# Altium PCB helix_4_multi_shield_host.PcbDoc (part 3 of 3)
Units mm, origin at the board's own origin, x right, y up, seen from the top; angles counter-clockwise.
Board outline 150 x 170 mm, 2 copper layers (Top Layer, Bottom Layer); 120 components, 166 nets, 674 pads, 2020 vias.
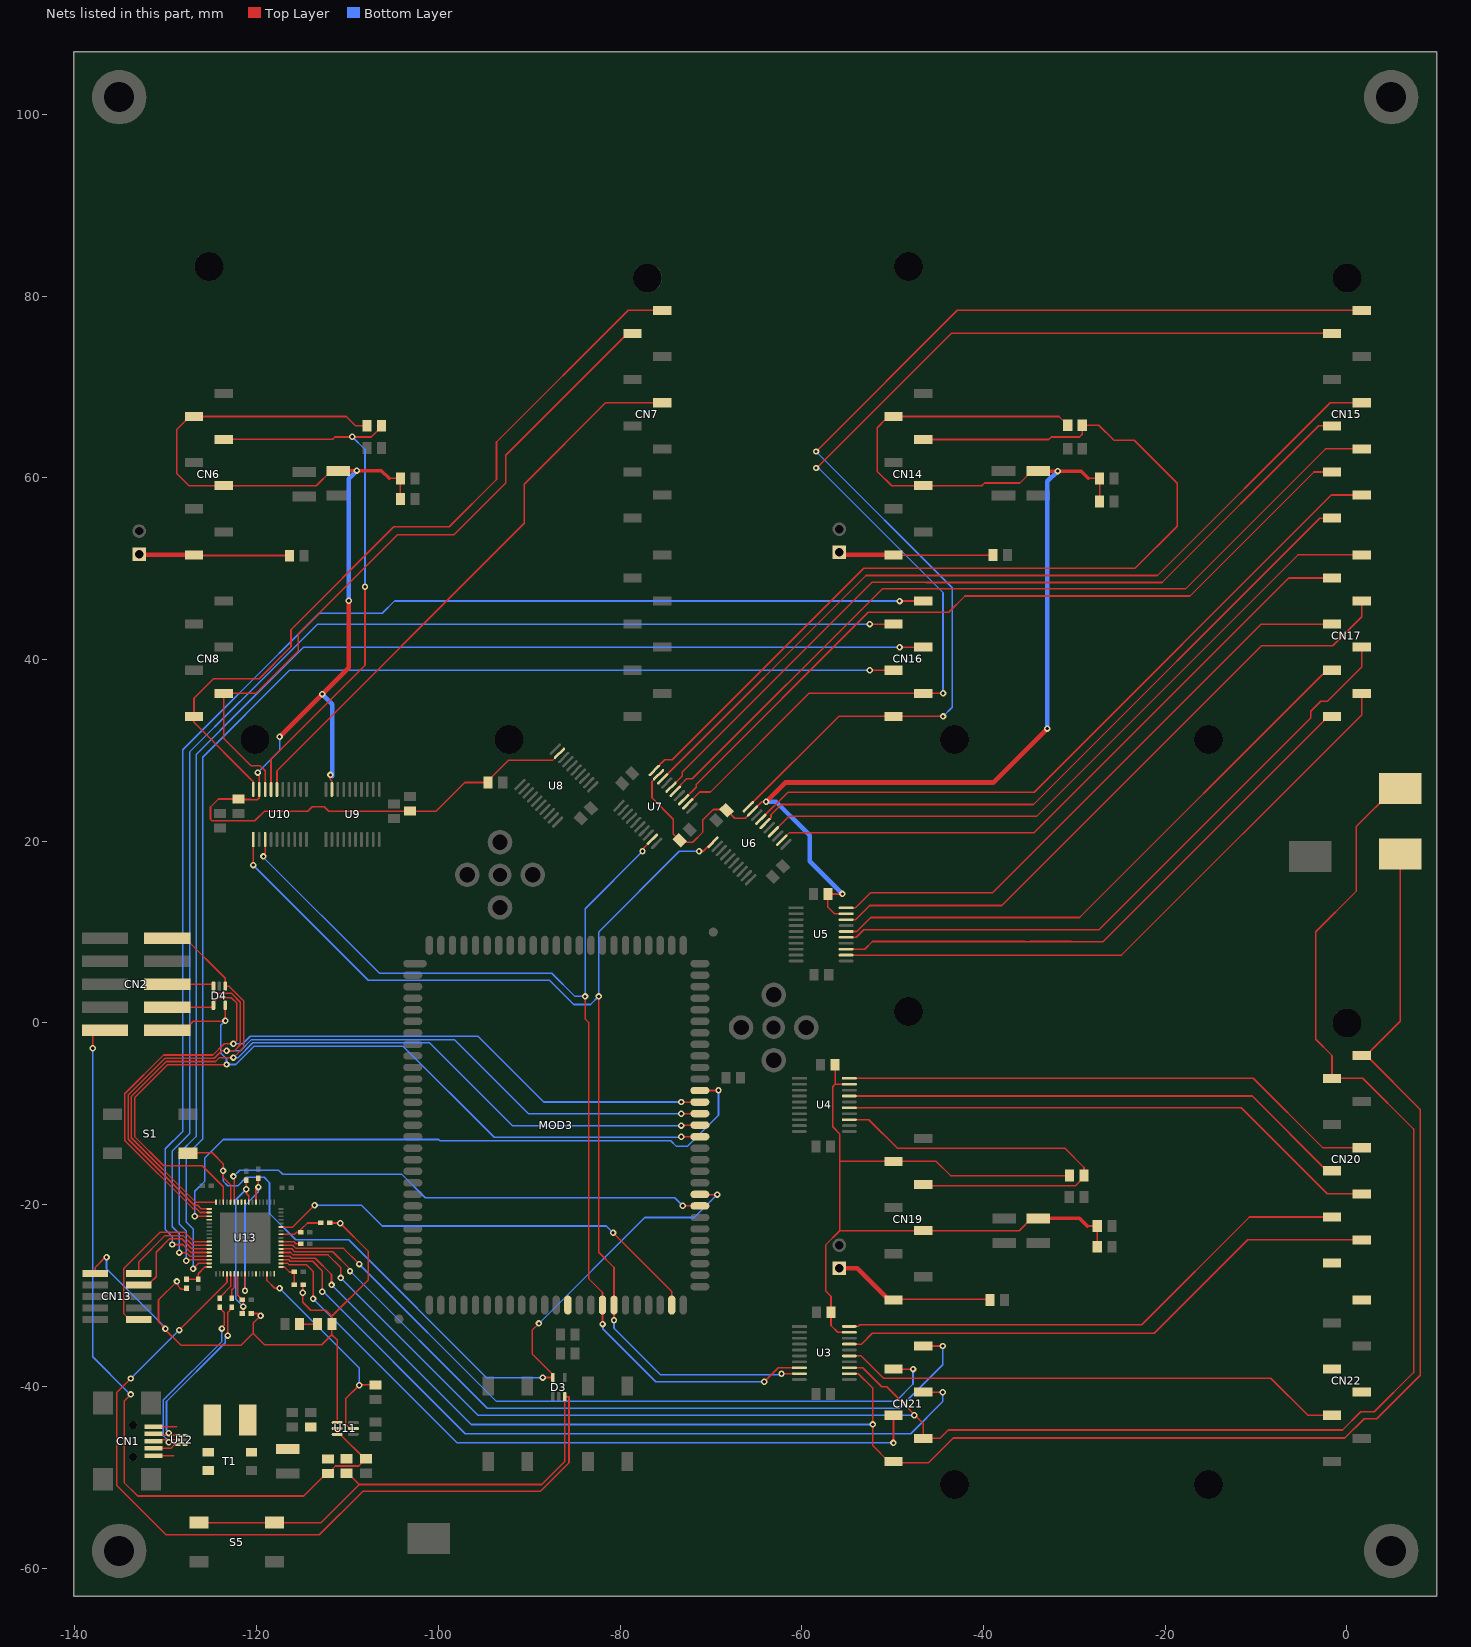
[diagram p3: the nets of this part, all layers, seen from the top]

## Via types
v1: diameter 0.711, hole 0.356, Top Layer to Bottom Layer, tented both sides, 2016 vias
v2: diameter 0.711, hole 0.356, Top Layer to Bottom Layer, tented top, 4 vias

## Nets (pads, with @x,y where several pads share a name; then routed paths per layer and width w, separated by ;. In a path a pad name is that pad's centre, name@x,y a point inside that pad or via, vN(x,y) a via of type N, cw(c..) or ccw(c..) an arc to the next point about the centre after c; other vN are vias at no path point) (continued)
MOD0_D13: CN7.34 U10.16 | length 63.8
  Top Layer w0.178: U10.16@-117.766,25.7 -117.766,27.776 -90.551,54.991 -90.551,59.309 -81.592,68.268 CN7.34@-75.36,68.268
MOD1_A0: CN16.9 U13.13 | length 148.3
  Top Layer w0.178: v1(-129.286,-24.384) -128.128,-24.384 -127.245,-25.267 U13.13@-125.219,-25.267 ; v1(-49.234,46.44) CN16.9@-46.62,46.44
  Bottom Layer w0.178: v1(-129.286,-24.384) -129.286,-23.495 -130.048,-22.733 -130.048,-13.843 -128.143,-11.938 -128.143,30.068 -122.413,35.799 -122.204,36.007 -121.996,36.215 -113.126,45.085 -106.172,45.085 -104.817,46.44 v1(-49.234,46.44)
MOD1_A1: CN16.10 U13.14 | length 143
  Top Layer w0.178: v1(-128.524,-25.273) -127.742,-25.273 -127.348,-25.667 U13.14@-125.219,-25.667 ; v1(-52.514,43.9) CN16.10@-49.9,43.9
  Bottom Layer w0.178: v1(-128.524,-25.273) -128.524,-23.197 -129.286,-22.435 -129.286,-14.097 -127.381,-12.192 -127.381,29.825 -121.91,35.296 -121.701,35.504 -113.306,43.9 v1(-52.514,43.9)
MOD1_A2: CN16.11 U13.15 | length 144.3
  Top Layer w0.178: v1@-127.762,-26.067 U13.15@-125.219,-26.067 ; v1(-49.234,41.36) CN16.11@-46.62,41.36
  Bottom Layer w0.178: v1(-127.762,-26.162) -127.762,-22.9 -128.524,-22.138 -128.524,-14.351 -126.67,-12.497 -126.67,29.53 -121.407,34.793 -114.84,41.36 v1(-49.234,41.36)
MOD1_A3: CN16.12 U13.16 | length 139.4
  Top Layer w0.178: v1(-127,-27.051) -126.416,-26.467 U13.16@-125.219,-26.467 ; v1(-52.514,38.82) CN16.12@-49.9,38.82
  Bottom Layer w0.178: v1(-127,-27.051) -127,-22.656 -127.75,-21.906 -127.75,-14.593 -125.933,-12.776 -125.933,29.261 -116.374,38.82 v1(-52.514,38.82)
MOD1_D0: CN17.21 U5.13 | length 64.2
  Top Layer w0.178: U5.13@-55.116,8.12 -53.062,8.12 -52.216,8.966 -35.449,8.966 -35.411,8.928 -34.896,8.928 -34.858,8.966 -30.369,8.966 -30.331,8.928 -26.852,8.928 -2.04,33.74 CN17.21@-1.64,33.74
MOD1_D1: CN17.22 U5.12 | length 70.1
  Top Layer w0.178: U5.12@-55.116,7.47 -24.799,7.47 1.64,33.909 CN17.22@1.64,36.28
MOD1_D2: CN17.23 U5.16 | length 65.4
  Top Layer w0.178: U5.16@-55.116,10.07 -53.938,10.07 -52.4,11.608 -29.422,11.608 -2.21,38.82 CN17.23@-1.64,38.82
MOD1_D3: CN17.24 U5.15 | length 71.7
  Top Layer w0.178: U5.15@-55.116,9.42 -54.004,9.42 -53.162,10.262 -27.279,10.262 -3.975,33.566 -3.975,34.303 -2.871,35.407 -2.133,35.407 1.634,39.174 1.634,41.354 CN17.24@1.64,41.36
MOD1_D4: CN17.25 U5.20 | length 66.4
  Top Layer w0.178: U5.20@-55.116,12.67 -54.08,12.67 -52.399,14.351 -38.989,14.351 -9.44,43.9 CN17.25@-1.64,43.9
MOD1_D5: CN17.26 U5.18 | length 72.3
  Top Layer w0.178: U5.18@-55.116,11.37 -54.08,11.37 -52.521,12.929 -37.998,12.929 -9.398,41.529 -1.551,41.529 1.64,44.72 CN17.26@1.64,46.44
MOD1_D6: CN17.27 U6.12 | length 72.5
  Top Layer w0.178: U6.12@-62.2,20.112 -61.357,20.955 -34.417,20.955 -6.392,48.98 CN17.27@-1.64,48.98
MOD1_D7: CN17.28 U6.14 | length 77.4
  Top Layer w0.178: U6.14@-63.119,21.031 -61.417,22.733 -34.163,22.733 -5.376,51.52 CN17.28@1.64,51.52
MOD1_D8: CN15.29 U6.16 | length 76.5
  Top Layer w0.178: U6.16@-64.038,21.95 -63.382,22.606 -63.382,22.929 -62.263,24.049 -34.498,24.049 -2.979,55.568 CN15.29@-1.64,55.568
MOD1_D9: CN15.30 U6.17 | length 80.9
  Top Layer w0.178: U6.17@-64.498,22.41 -61.508,25.4 -34.417,25.4 -1.709,58.108 CN15.30@1.64,58.108
MOD1_D10: CN15.31 U7.13 | length 86.5
  Top Layer w0.178: U7.13@-73.01,24.572 -71.628,25.953 -71.628,26.255 -52.671,45.212 -43.815,45.212 -42.037,46.99 -17.272,46.99 -3.614,60.648 CN15.31@-1.64,60.648
MOD1_D11: CN15.32 U7.15 | length 90.8
  Top Layer w0.178: U7.15@-73.617,25.835 -73.585,25.835 -73.3,26.12 -73.3,26.255 -72.681,26.873 -72.06,26.873 -51.156,47.777 -17.755,47.777 -2.344,63.188 CN15.32@1.64,63.188
MOD1_D12: CN15.33 U7.16 | length 89.5
  Top Layer w0.178: U7.16@-74.388,25.95 -73.152,27.187 -73.152,27.626 -52.264,48.514 -46.309,48.514 -46.284,48.489 -20.345,48.489 -3.106,65.728 CN15.33@-1.64,65.728
MOD1_D13: CN15.34 U7.18 | length 94.1
  Top Layer w0.178: U7.18@-75.308,26.87 -52.927,49.251 -20.853,49.251 -1.836,68.268 CN15.34@1.64,68.268
MOD2_A0: CN21.9 U13.40 | length 86.5
  Top Layer w0.178: U13.40@-117.319,-24.867 -116.139,-24.867 -115.831,-25.174 -111.628,-25.174 -109.728,-27.075 v1(-109.728,-27.305) ; CN21.9@-46.62,-35.56 v1(-44.472,-35.56)
  Bottom Layer w0.178: v1@-109.664,-27.241 -109.664,-27.368 -94.615,-42.418 -49.276,-42.418 -44.472,-37.614 v1(-44.472,-35.56)
MOD2_A1: CN21.10 U13.41 | length 81.3
  Top Layer w0.178: U13.41@-117.319,-24.467 -116.031,-24.467 -115.679,-24.819 -110.436,-24.819 v1(-108.712,-26.543) ; CN21.10@-49.9,-38.1 v1(-47.752,-38.1)
  Bottom Layer w0.178: v1@-108.775,-26.607 -108.648,-26.607 -93.599,-41.656 -49.657,-41.656 -47.752,-39.751 v1(-47.752,-38.1)
MOD2_A2: CN21.11 U13.37 | length 87
  Top Layer w0.178: U13.37@-117.319,-26.067 -116.473,-26.067 -116.299,-26.241 -113.84,-26.241 -112.776,-27.305 v1(-112.776,-29.591) ; CN21.11@-46.62,-40.64 v1(-44.472,-40.64)
  Bottom Layer w0.178: v1@-112.903,-29.337 -97.028,-45.212 -48.006,-45.212 -44.472,-41.678 v1(-44.472,-40.64)
MOD2_A3: CN21.12 U13.36 | length 80.5
  Top Layer w0.178: U13.36@-117.319,-26.467 -116.576,-26.467 -116.446,-26.597 -114.537,-26.597 -113.792,-27.342 v1(-113.792,-30.353) ; v1@-49.9,-46.355 CN21.12@-49.9,-43.18
  Bottom Layer w0.178: v1(-113.792,-30.353) -97.917,-46.228 v1(-49.911,-46.228)
MOD2_D2: CN22.23 U3.15 | length 55.8
  Top Layer w0.178: U3.15@-54.766,-36.65 -53.455,-36.65 -51.005,-39.1 -8.366,-39.1 -4.286,-43.18 CN22.23@-1.64,-43.18
MOD2_D3: CN22.24
MOD2_D4: CN22.25
MOD2_D7: CN22.28
MOD2_D8: CN20.29
MOD2_D9: CN20.30 U3.17 | length 61.2
  Top Layer w0.178: U3.17@-54.766,-35.35 -53.435,-35.35 -52.248,-34.163 -21.209,-34.163 -10.922,-23.876 CN20.30@1.64,-23.876
MOD2_D10: CN20.31 U3.20 | length 58.6
  Top Layer w0.178: U3.20@-54.766,-33.4 -53.776,-33.4 -53.601,-33.225 -22.583,-33.225 -10.719,-21.361 CN20.31@-1.626,-21.361 ; CN20.31@-2.13,-21.336 CN20.31@-1.64,-21.336
MOD2_D11: CN20.32 U4.15 | length 60.9
  Top Layer w0.178: U4.15@-54.766,-9.346 -11.62,-9.346 -2.17,-18.796 CN20.32@2.23,-18.796
MOD2_D12: CN20.33 U4.17 | length 56.5
  Top Layer w0.178: U4.17@-54.766,-8.046 -10.42,-8.046 -2.21,-16.256 CN20.33@-1.64,-16.256
MOD2_D13: CN20.34 U4.20 | length 60.1
  Top Layer w0.178: U4.20@-54.712,-6.096 -10.29,-6.096 -2.67,-13.716 1.64,-13.716 CN20.34@2.21,-13.716
NCE: MOD3.70 U13.3 | length 72.4
  Top Layer w0.178: v1(-126.815,-21.267) U13.3@-125.219,-21.267 ; MOD3.70@-71.216,-7.44 v1@-69.156,-7.44
  Bottom Layer w0.178: v1(-126.815,-21.267) -126.815,-18.535 -125.73,-17.45 -125.73,-14.884 -123.673,-12.827 -99.945,-12.827 -99.821,-12.951 -74.425,-12.951 -73.787,-13.589 -72.605,-13.589 -69.166,-10.15 v1(-69.166,-7.4)
NCONFIG: D3.5 MOD3.61 S1.2@-127.549,-14.342 U13.64 | length 93.8
  Top Layer w0.178: -128.6,-14.3 -124.892,-14.3 -123.673,-15.519 -123.673,-17.002 -122.869,-17.806 U13.64@-122.869,-19.717 ; v1(-88.925,-33.071) -89.662,-33.807 -89.662,-36.449 -87.391,-38.72 D3.5@-87.391,-39.031 -88.51,-39.031 v1(-88.519,-39.04) ; MOD3.61@-71.147,-18.919 -71.117,-18.889 v1(-69.297,-18.889)
  Bottom Layer w0.178: v1(-123.698,-16.256) -123.698,-17.399 -123.19,-17.907 -122.047,-17.907 -121.133,-16.993 -119.177,-16.993 -118.593,-17.577 -118.593,-17.856 ; -118.618,-17.882 -118.593,-17.907 -118.593,-20.98 -115.697,-23.876 -109.855,-23.876 -94.691,-39.04 -88.671,-39.04 v1@-88.519,-39.192 ; v1(-88.925,-33.071) -77.267,-21.412 -71.82,-21.412 v1(-69.297,-18.889)
NCSO: MOD3.51 U13.46 | length 49.4
  Top Layer w0.178: U13.46@-117.319,-22.467 -116.03,-22.467 v1(-113.629,-20.066) ; v1(-80.766,-23.1) -74.316,-29.55 MOD3.51@-74.316,-31.05
  Bottom Layer w0.178: v1@-113.574,-20.066 -108.458,-20.066 -106.174,-22.35 -81.516,-22.35 v1(-80.766,-23.1)
NetC10_1: C10.1 L7.1 U13.44 | length 4.7
  Top Layer w0.178: U13.44@-117.319,-23.267 -115.824,-23.267 -115.589,-23.032 C10.1@-115.165,-23.032 ; -115.173,-22.778 -114.411,-22.016 L7.1@-113.014,-22.016
NetC12_1: C12.1 U13.42 | length 2.3
  Top Layer w0.178: U13.42@-117.319,-24.067 -115.928,-24.067 -115.693,-24.302 C12.1@-115.165,-24.302
NetC13_2: C13.2 L14.1 U13.17 | length 3.4
  Top Layer w0.178: L14.1@-127.722,-28.221 C13.2@-126.402,-28.221 ; C13.2@-126.441,-28.194 -126.441,-27.595 -125.713,-26.867 U13.17@-125.219,-26.867
NetC14_2: C14.2 L15.1 U13.35 | length 2.9
  Top Layer w0.178: U13.35@-117.319,-26.867 -116.933,-26.867 -116.393,-27.407 C14.2@-116.139,-27.407 ; C14.2@-115.877,-27.407 -115.851,-27.433 -115.851,-27.695 L15.1@-115.851,-28.931
NetCN1_5: CN1.5 T1.3 U12.4 | length 2.3
  Top Layer w0.178: CN1.5@-131.361,-47.631 -129.109,-47.631 ; U12.4@-127.881,-46.403 U12.4@-127.881,-46.396
NetD5_K: D5.K R29.1 | length 2
  Top Layer w0.178: R29.1@-115.301,-33.147 D5.K@-113.322,-33.147
NetF1_1: F1.1 T1.1
NetU13_4: U13.4
NetU13_20: U13.20
NetU13_29: U13.29
NetU13_34: U13.34
NetU13_60: U13.60
NetU13_61: U13.61
NetU13_62: U13.62
NSTATUS: MOD3.60 U13.63 | length 55.9
  Top Layer w0.178: U13.63@-122.469,-19.717 v1@-122.469,-17.018 ; v1(-73.095,-20.125) -71.275,-20.125 MOD3.60@-71.245,-20.095
  Bottom Layer w0.178: v1(-122.555,-16.891) -121.869,-16.205 -117.602,-16.205 -117.196,-16.612 ; -117.196,-16.637 -104.049,-16.637 -101.45,-19.236 -73.984,-19.236 v1(-73.095,-20.125)
P15_6: R19.1 U13.22 | length 3.1
  Top Layer w0.178: R19.1@-123.936,-30.279 -123.936,-30.073 -122.869,-29.006 U13.22@-122.869,-27.617
P15_7: R27.1 U13.23 | length 2.8
  Top Layer w0.178: R27.1@-122.729,-30.279 -122.729,-29.369 -122.469,-29.109 U13.23@-122.469,-27.617
POWER_EN: R12.2 U11.G1 U13.32 | length 24.5
  Top Layer w0.178: U13.32@-118.869,-27.617 -118.869,-28.343 -118.002,-29.21 v1(-117.475,-29.21) ; U11.G1@-109.344,-44.638 -109.744,-44.638 -110.211,-44.171 -110.211,-41.377 v1(-108.712,-39.878) -108.674,-39.84 R12.2@-106.934,-39.84
  Bottom Layer w0.178: v1(-117.475,-29.21) -108.712,-37.973 v1(-108.712,-39.878)
POWER_EN_N: CN2.2 R10.1 R11.2 U11.D1 U11.G2 | length 85.9
  Top Layer w0.178: v1(-138.049,-2.794) CN2.2@-138.049,-0.381 ; v1@-133.794,-40.831 -134.595,-41.631 -134.595,-50.571 -133.096,-52.07 -114.808,-52.07 -112.339,-49.601 R10.1@-112.158,-49.601 -111.325,-48.768 -108.75,-48.768 R11.2@-107.95,-47.968 -108.115,-47.968 -110.795,-45.288 U11.D1@-111.144,-45.288 U11.G2@-111.144,-44.638
  Bottom Layer w0.178: v1(-138.049,-2.794) -138.049,-36.754 -134.163,-40.64
  other v1: -133.858,-40.894
PSOC_VDDD: C8.1 C15.1 L3.2 U13.24 U13.59 | length 21
  Top Layer w0.178: U13.24@-122.069,-27.617 -122.069,-29.986 -121.465,-30.59 L3.2@-121.465,-32.106 ; C8.1@-121.142,-17.309 -121.142,-18.758 -120.869,-19.031 U13.59@-120.869,-19.717
  Bottom Layer w0.178: v1(-121.473,-31.217) -122.301,-30.389 -122.301,-19.451 v1(-121.15,-18.3)
RST_0: CN6.3 R3.1 U10.17 | length 61.7
  Top Layer w0.178: CN6.3@-123.62,64.22 -123.585,64.255 -111.622,64.255 -111.377,64.5 -107.377,64.5 -106.277,65.6 R3.1@-106.277,65.744 ; U10.17@-118.416,25.7 -118.416,29.031 -108.077,39.37 v1(-108.077,48.006)
  Bottom Layer w0.178: v1(-109.474,64.516) -108.077,63.119 -108.077,62.23 v1(-108.077,48.006)
RST_1: CN14.3 R6.1 U7.20 | length 105.4
  Top Layer w0.178: U7.20@-76.227,27.789 -75.586,28.43 -75.586,28.6 -75.454,28.6 -75.086,28.969 -74.257,28.969 -53.188,50.038 -23.317,50.038 -18.669,54.686 -18.669,59.411 -23.393,64.135 -25.629,64.135 -27.293,65.8 R6.1@-29.123,65.8 -29.123,64.8 -29.423,64.5 -32.523,64.5 -32.803,64.22 CN14.3@-46.62,64.22
RST_2: CN19.3 R1.1 U4.13 | length 47.1
  Top Layer w0.178: U4.13@-54.813,-10.648 -52.624,-10.648 -49.471,-13.8 -31.031,-13.8 -28.927,-15.904 R1.1@-28.927,-16.8 -28.927,-16.989 -29.838,-17.9 CN19.3@-46.5,-17.9
SCL: MOD3.46 U3.9 U6.1 U10.1 | length 131.5
  Top Layer w0.178: v1(-120.366,17.375) U10.1@-120.366,20.2 ; v1@-82.355,2.95 v1(-82.355,2.925) -82.355,-25.225 -80.666,-26.914 MOD3.46@-80.666,-31.05 v1@-80.666,-32.8 ; v1(-71.305,18.9) -70.839,18.9 -69.839,19.9 U6.1@-69.766,19.9 ; v1@-62.155,-38.6 U3.9@-60.266,-38.6
  Bottom Layer w0.178: v1@-120.53,17.514 -107.715,4.699 -87.757,4.699 -85.09,2.032 -83.248,2.032 v1(-82.355,2.925) -82.355,10.016 -73.471,18.9 v1(-71.305,18.9) ; v1@-80.805,-32.65 -80.666,-32.789 -80.666,-33.614 -75.545,-38.735 -62.357,-38.735 v1(-62.23,-38.608)
  other v1: -80.666,-32.725
SCL_0: CN7.38 CN8.14 U10.20 | length 85.5
  Top Layer w0.178: U10.20@-120.366,25.7 -120.366,26.564 -126.9,33.098 CN8.14@-126.9,33.74 -126.9,35.746 -124.746,37.9 -119.716,37.9 -116.216,41.4 -116.216,43.296 -104.902,54.61 -98.806,54.61 -93.599,59.817 -93.599,63.957 -79.112,78.444 CN7.38@-75.36,78.444
SCL_1: CN15.38 CN16.14 U6.20 | length 128.1
  Top Layer w0.178: U6.20@-65.877,23.789 -55.926,33.74 CN16.14@-49.9,33.74 v1(-44.45,33.74) v1@-44.475,33.74 ; v1@-58.53,62.8 -42.886,78.444 CN15.38@1.64,78.444
  Bottom Layer w0.178: v1@-58.43,63 v1(-58.43,62.9) -43.434,47.904 -43.434,34.756 v1(-44.45,33.74)
SCL_2: CN20.38 CN21.14 TP3.1 U3.12 U13.38 | length 209.5
  Top Layer w0.178: U13.38@-117.319,-25.667 -116.37,-25.667 -116.152,-25.885 -113.561,-25.885 -111.76,-27.686 v1(-111.76,-28.829) ; U3.12@-54.766,-38.6 -53.78,-38.6 -52.197,-40.183 -52.197,-46.519 -50.456,-48.26 CN21.14@-49.9,-48.26 -49.76,-48.4 -46.038,-48.4 -43.325,-45.687 -0.221,-45.687 1.905,-43.561 3.302,-43.561 8.095,-38.768 8.095,-9.525 2.126,-3.556 5.87,0.188 TP3.1@5.87,18.6
  Bottom Layer w0.178: v1(-111.76,-28.829) -96.393,-44.196 v1(-52.197,-44.196)
SDA: MOD3.45 U3.8 U7.9 U10.3 | length 126.5
  Top Layer w0.178: v1@-119.405,18.278 -119.354,18.329 -119.354,18.376 -119.066,18.664 U10.3@-119.066,20.2 ; v1@-83.845,2.925 v1(-83.845,2.921) -83.845,0.44 -83.466,0.061 -83.466,-28.138 -81.936,-29.668 -81.936,-32.93 v1@-81.866,-33 ; v1@-77.53,18.8 v1(-77.53,18.9) -77.53,19.132 U7.9@-76.439,20.223 ; v1(-64.135,-39.497) -62.588,-37.95 U3.8@-60.266,-37.95
  Bottom Layer w0.178: v1@-119.354,18.329 -106.487,5.461 -87.503,5.461 -84.963,2.921 v1(-83.845,2.921) ; v1@-83.845,2.925 -83.845,12.584 v1(-77.53,18.9) ; v1@-81.866,-33 -81.905,-33.039 -81.905,-33.661 -76.069,-39.497 v1(-64.135,-39.497)
  other v1: -81.93,-33.15 -119.255,18.329
SDA_0: CN7.37 CN8.13 U10.18 | length 77.3
  Top Layer w0.178: U10.18@-119.066,25.7 -119.066,27.753 -119.634,28.321 -120.625,28.321 -123.62,31.316 CN8.13@-123.62,36.28 -120.082,36.28 -115.443,40.919 -115.443,42.799 -104.521,53.721 -98.298,53.721 -92.583,59.436 -92.583,62.484 -79.163,75.904 CN7.37@-78.64,75.904
SDA_1: CN15.37 CN16.13 U7.12 | length 126.6
  Top Layer w0.178: U7.12@-72.55,24.112 -71.236,25.425 -70.053,25.425 -59.199,36.28 CN16.13@-46.62,36.28 v1@-44.399,36.28 ; v1@-58.381,61.048 -43.526,75.904 CN15.37@-1.64,75.904
  Bottom Layer w0.178: v1@-58.166,61.087 -44.45,47.371 v1(-44.45,36.28)
  other v1: -58.42,61.087
SDA_2: CN20.37 CN21.13 TP2.1 U3.13 U13.39 | length 222.1
  Top Layer w0.178: U13.39@-117.319,-25.267 -116.267,-25.267 -116.004,-25.53 -112.138,-25.53 -110.744,-26.924 -110.744,-27.94 v1@-110.871,-28.067 ; U3.13@-54.766,-37.95 -53.287,-37.95 -51.181,-40.056 -50.66,-40.056 -46.62,-44.096 CN21.13@-46.62,-45.72 -44.78,-45.72 -43.866,-44.806 -0.483,-44.806 1.524,-42.799 3.027,-42.799 7.345,-38.481 7.345,-11.675 1.766,-6.096 -1.64,-6.096 -1.64,-3.59 -3.43,-1.8 -3.43,10.032 1.016,14.478 1.016,21.59 5.216,25.79 TP2.1@5.87,25.79
  Bottom Layer w0.178: v1(-110.744,-28.067) -95.631,-43.18 v1(-47.625,-43.18)
SW_0: D3.3 R9.2 S5.2 U13.21 | length 143.4
  Top Layer w0.178: v1(-133.858,-39.136) -135.382,-40.66 -135.382,-50.927 -129.972,-56.337 -113.106,-56.337 -108.331,-51.562 -88.773,-51.562 -85.623,-48.412 -85.623,-41.173 -85.666,-41.131 D3.3@-86.091,-41.131 -86.091,-48.27 -88.621,-50.8 -108.712,-50.8 ; v1(-128.524,-33.802) -123.269,-28.547 U13.21@-123.269,-27.617 ; S5.2@-126.324,-55 S5.2@-118.024,-55 -112.912,-55 -108.712,-50.8 ; R9.2@-110.109,-49.568 -109.944,-49.568 -108.712,-50.8
  Bottom Layer w0.178: v1(-133.858,-39.136) v1(-128.524,-33.802)
SWDCK: CN13.4 U13.12 | length 10.5
  Top Layer w0.178: CN13.4@-131.699,-28.575 -131.064,-27.94 -131.064,-25.238 -129.587,-23.762 -128.247,-23.762 -127.142,-24.867 U13.12@-125.219,-24.867
SWDIO: CN13.2 U13.11 | length 10.7
  Top Layer w0.178: CN13.2@-132.982,-27.559 -132.982,-26.302 -130.086,-23.406 -128.1,-23.406 -127.039,-24.467 U13.11@-125.219,-24.467
TCK: CN2.1 D4.5 MOD3.66 U13.66 | length 100.5
  Top Layer w0.178: CN2.1@-129.844,-0.813 -127.965,-0.813 -126.975,0.178 -123.52,0.178 -123.454,0.244 D4.5@-123.454,1.896 ; U13.66@-123.669,-19.717 -123.669,-18.038 -125.984,-15.723 -130.216,-15.723 -133.439,-12.499 -133.439,-8.231 -129.805,-4.597 v1@-123.317,-4.597 ; v1(-73.266,-12.52) MOD3.66@-71.216,-12.52
  Bottom Layer w0.178: v1(-123.444,0.254) -123.939,-0.241 -123.939,-3.306 -123.317,-3.928 v1(-123.317,-4.572) -122.301,-4.572 -120.274,-2.545 -103.906,-2.545 -93.856,-12.595 v1@-73.266,-12.595
TDI_FPGA: CN2.9 D4.1 MOD3.67 U13.68 | length 104.3
  Top Layer w0.178: CN2.9@-129.844,9.347 -127.889,9.347 -123.454,4.913 D4.1@-123.454,4.047 -123.046,4.047 -121.437,2.438 -121.437,-2.687 -122.56,-3.81 -124.089,-3.81 -124.521,-4.242 -129.953,-4.242 -133.794,-8.084 -133.794,-12.647 -126.724,-19.717 U13.68@-124.469,-19.717 ; v1(-73.266,-11.3) -73.216,-11.25 MOD3.67@-71.216,-11.25
  Bottom Layer w0.178: v1(-122.555,-3.81) -122.042,-3.81 -120.416,-2.184 -100.965,-2.184 -91.849,-11.3 -73.623,-11.3 -73.444,-11.122 v1@-73.444,-11.378
TDO_FPGA: CN2.3 D4.4 MOD3.69 U13.2 | length 99.4
  Top Layer w0.178: CN2.3@-129.844,1.727 D4.4@-124.924,1.727 ; U13.2@-125.219,-20.867 -126.199,-20.867 -126.638,-20.428 -127.019,-20.428 -134.506,-12.941 -134.506,-7.789 -130.247,-3.531 -124.816,-3.531 -123.571,-2.286 v1(-122.555,-2.286) -122.174,-1.905 -122.174,2.159 -122.784,2.769 -124.231,2.769 -124.754,2.246 D4.4@-124.754,1.947 ; v1@-73.207,-8.71 MOD3.69@-71.216,-8.71
  Bottom Layer w0.178: v1(-122.555,-2.286) -121.524,-2.286 -120.711,-1.473 -95.631,-1.473 -88.404,-8.7 v1(-73.266,-8.7)
TMS: CN2.5 D4.3 MOD3.68 U13.1 | length 101.2
  Top Layer w0.178: CN2.5@-129.844,4.267 D4.3@-124.852,4.267 ; U13.1@-125.219,-20.467 -126.091,-20.467 -126.485,-20.073 -126.872,-20.073 -134.15,-12.794 -134.15,-7.936 -130.1,-3.886 -124.668,-3.886 -123.83,-3.048 -122.437,-3.048 -121.793,-2.404 -121.793,2.291 -122.778,3.277 -124.587,3.277 -124.754,3.444 D4.3@-124.754,4.047 ; v1(-73.266,-10) MOD3.68@-71.306,-10
  Bottom Layer w0.178: v1(-123.317,-3.048) -121.783,-3.048 -120.564,-1.829 -98.247,-1.829 -90.076,-10 v1(-73.266,-10)
USB_ID: CN1.4 U12.3 | length 2.9
  Top Layer w0.178: CN1.4@-131.361,-46.831 -129.47,-46.831 -129.035,-46.396 U12.3@-128.661,-46.396
USB_M: CN1.2 R27.2 U12.1 | length 20
  Top Layer w0.178: CN1.2@-131.361,-45.231 -131.196,-45.396 v1@-129.677,-45.396 ; v1@-129.804,-45.142 v1(-129.677,-45.142) v1@-129.677,-45.396 ; U12.1@-128.661,-45.396 v1@-129.677,-45.396 ; v1@-123.19,-34.142 -123.19,-31.877 -122.729,-31.416 R27.2@-122.729,-31.279
  Bottom Layer w0.178: v1(-129.677,-45.142) -129.921,-44.898 -129.921,-41.656 -123.469,-35.204 -123.469,-34.676 v1@-123.063,-34.269
  other v1: -123.19,-34.417
USB_P: CN1.3 R19.2 U12.2 | length 21.7
  Top Layer w0.178: CN1.3@-131.361,-46.031 -131.226,-45.896 -129.954,-45.896 ; v1@-129.446,-45.896 -129.954,-45.896 ; U12.2@-128.661,-45.896 -129.43,-45.896 -129.692,-46.158 -129.954,-45.896 ; R19.2@-124.19,-31.258 -123.571,-31.877 -123.571,-33.253 v1@-123.825,-33.507
  Bottom Layer w0.178: v1(-129.677,-46.158) -129.677,-46.022 -130.3,-45.4 -130.3,-41.532 -123.825,-35.057 -123.825,-34.798 ; -123.825,-34.782 v1@-123.825,-33.507
  other v1: -123.825,-33.634
VCC_0: C21.2 C27.2 C29.1 C30.2 CN6.2 CN6.5 L1.2 L12.2 R3.2 U8.19 U9.19 U10.19 | length 155.1
  Top Layer w0.178: CN6.2@-127.591,66.4 -127.716,66.4 -128.816,65.3 -128.816,60.5 -127.456,59.14 CN6.5@-123.62,59.14 -113.432,59.14 -111.822,60.75 C29.1@-111.027,60.75 ; CN6.2@-126.9,66.76 -110.137,66.76 -109.121,65.744 R3.2@-107.877,65.744 ; -124.807,22.245 -120.197,22.245 -119.13,23.312 -114.381,23.312 -113.894,23.8 -112.553,23.8 -112.065,23.312 C27.2@-103.116,23.312 -100.259,23.312 -97.109,26.462 C21.2@-94.516,26.462 -94.516,26.687 -92.304,28.9 -87.447,28.9 U8.19@-86.667,29.679 ; -124.807,22.25 -124.91,22.25 -125.08,22.42 -125.08,23.77 -124.2,24.65 -122.455,24.65 -122.155,24.35 -121.966,24.35 -121.716,24.6 -120.584,24.6 -120.554,24.57 -119.935,24.57 -119.716,24.789 U10.19@-119.716,25.7 -119.716,27.387 v1(-119.888,27.559) ; v1@-112.848,36.195 v1(-112.776,36.195) ; v1(-111.887,27.305) -111.887,26.797 -111.716,26.626 U9.19@-111.716,25.7 ; -105.41,59.944 L12.2@-104.178,59.944 L1.2@-104.178,57.658
  Top Layer w0.381: C29.1@-110.363,60.8 -106.266,60.8 -105.41,59.944
  Top Layer w0.508: v1(-117.475,31.496) v1(-112.776,36.195) -109.855,39.116 v1(-109.855,46.482)
  Bottom Layer w0.178: v1(-119.888,27.559) -117.475,29.972 v1(-117.475,31.496)
  Bottom Layer w0.508: v1(-112.776,36.195) -111.68,35.099 v1@-111.68,27.145 ; v1@-109.866,46.482 -109.866,59.911 v1(-108.977,60.8)
VCC_1: C7.1 C32.2 C34.2 C36.2 CN14.2 CN14.5 L6.2 L11.2 R6.2 U5.19 U6.19 U7.19 | length 158.5
  Top Layer w0.178: U7.19@-75.767,27.329 -76.486,26.61 -76.486,24.793 -74.13,22.437 -74.13,20.801 C36.2@-73.446,20.117 -73.229,19.9 -71.999,19.9 -70.88,21.018 -70.88,22.353 -69.741,23.492 C34.2@-68.338,23.492 ; C34.2@-68.281,23.435 -67.367,22.521 -66.235,22.521 -65.762,22.994 U6.19@-65.762,23.037 ; U6.19@-65.417,23.329 -64.397,24.35 v1(-63.93,24.35) ; v1(-55.53,14.2) C32.2@-57.13,14.2 -57.13,12.764 -56.386,12.02 U5.19@-55.116,12.02 ; CN14.2@-50.741,66.475 -51.689,65.527 -51.689,60.706 -50.103,59.12 CN14.5@-46.62,59.12 ; CN14.2@-49.9,66.76 -31.683,66.76 R6.2@-30.723,65.8 ; CN14.5@-46.62,59.14 -40.174,59.14 -39.878,59.436 -35.987,59.436 -34.673,60.75 C7.1@-33.973,60.75 ; -28.448,59.944 L6.2@-27.216,59.944 L11.2@-27.216,57.404
  Top Layer w0.381: C7.1@-33.973,60.75 v1(-31.823,60.75) -29.254,60.75 -28.448,59.944
  Top Layer w0.508: v1(-63.93,24.35) -61.818,26.462 -38.904,26.462 v1(-32.966,32.4)
  Bottom Layer w0.508: v1(-63.93,24.35) -62.839,24.35 -59.139,20.65 -59.139,17.809 v1(-55.53,14.2) ; v1@-32.966,32.336 v1(-32.966,32.4) -32.966,59.607 v1(-31.823,60.75)
VCC_2: C6.1 C38.2 C40.2 CN19.2 CN19.5 L5.2 L16.2 R1.2 U3.19 U4.19 | length 91.7
  Top Layer w0.178: C38.2@-56.58,-4.436 -56.33,-4.686 -56.33,-6.746 ; -55.81,-15.24 CN19.2@-49.9,-15.24 -45.19,-15.24 -43.63,-16.8 R1.2@-30.527,-16.8 ; U3.19@-54.766,-34.05 -56.026,-34.05 -56.78,-33.296 C40.2@-56.78,-31.85 -56.78,-30.08 -57.38,-29.48 -57.38,-24.43 -55.81,-22.86 ; U4.19@-54.766,-6.746 -56.33,-6.746 ; C6.1@-33.977,-21.5 -34.702,-21.5 -36.062,-22.86 CN19.5@-46.62,-22.86 -55.81,-22.86 ; -56.33,-6.746 -56.597,-7.012 -56.597,-11.434 -55.81,-12.22 -55.81,-22.86
  Top Layer w0.203: -28.575,-22.352 L5.2@-27.47,-22.352 L16.2@-27.47,-24.638
  Top Layer w0.381: C6.1@-33.977,-21.5 -29.427,-21.5 -28.575,-22.352
VCCD: C9.2 U13.26 U13.57 | length 16.5
  Top Layer w0.178: v1@-121.396,-29.255 -121.269,-29.128 U13.26@-121.269,-27.617 ; U13.57@-120.069,-19.717 -120.069,-18.342 -119.812,-18.085 -119.812,-17.122 -119.872,-17.062 C9.2@-119.872,-16.928
  Bottom Layer w0.178: v1@-121.396,-29.255 -121.285,-29.144 -121.285,-20.091 -119.812,-18.618 -119.812,-18.136 -119.755,-18.079 v1@-119.745,-18.079
  other v1: -121.285,-29.464 -119.812,-18.059
VCCIO_678: MOD3.42
VIN_0: CN6.8 CN11.1 L8.2 | length 16.9
  Top Layer w0.178: CN6.8@-127.566,51.55 -127.47,51.454 L8.2@-116.68,51.454
  Top Layer w0.508: CN11.1@-132.836,51.52 CN6.8@-126.9,51.52
VIN_1: CN5.1 CN14.8 L9.2 | length 16.3
  Top Layer w0.178: CN14.8@-49.9,51.5 L9.2@-39.243,51.5
  Top Layer w0.508: CN5.1@-55.576,51.52 CN14.8@-49.9,51.52
VIN_2: CN4.1 CN19.8 L10.2 | length 19.3
  Top Layer w0.178: CN19.8@-50.8,-30.425 -49.955,-30.425 L10.2@-38.88,-30.425
  Top Layer w0.508: CN4.1@-55.866,-27 -53.899,-27 -50.474,-30.425 -49.955,-30.425 CN19.8@-49.9,-30.48
VIN_5V: C2.1 CN13.1 D5.A L3.1 L7.2 L14.2 L15.2 R9.1 R10.2 R18.1 T1.2 U11.S2 | length 76.4
  Top Layer w0.178: CN13.1@-137.782,-27.559 -137.782,-26.911 -136.652,-25.781 v1(-136.525,-25.781) ; L14.2@-127.806,-29.306 -128.301,-29.306 -128.651,-28.956 -128.651,-28.575 v1(-128.778,-28.448) -130.81,-30.48 -130.81,-32.893 v1(-130.048,-33.655) -130.048,-33.782 -128.372,-35.458 -121.691,-35.458 -120.396,-34.163 ; L3.1@-120.592,-31.979 -119.822,-31.979 ; v1(-119.568,-32.233) -120.396,-33.061 -120.396,-34.163 ; v1(-114.919,-29.693) -114.919,-30.75 -114.046,-31.623 -112.395,-31.623 -111.722,-32.296 ; v1@-114.919,-29.636 L15.2@-114.919,-28.675 ; L7.2@-111.942,-22.016 v1@-110.826,-22.016 ; -111.144,-43.688 -111.144,-34.906 -111.722,-34.328 ; v1(-110.795,-22.047) -107.696,-25.146 -107.696,-28.27 -111.722,-32.296 ; -120.396,-34.163 -119.126,-35.433 -112.827,-35.433 -111.722,-34.328 ; -111.722,-34.328 D5.A@-111.722,-33.147 -111.722,-32.296
  Bottom Layer w0.178: v1(-136.525,-25.781) -136.525,-27.051 -130.048,-33.528 v1(-130.048,-33.655)
VIN_USB: CN1.1 F1.2 U12.6 | length 2.6
  Top Layer w0.178: CN1.1@-131.361,-44.431 -128.821,-44.431 ; U12.6@-127.881,-45.396 U12.6@-127.881,-45.371
XRES: CN13.10 U13.10 | length 18.4
  Top Layer w0.178: CN13.10@-132.982,-32.639 -133.985,-32.639 -134.649,-31.975 -134.649,-27.069 -130.631,-23.05 -127.953,-23.05 -126.936,-24.067 U13.10@-125.219,-24.067
pads on no net: CN1.0@-133.611,-44.281 CN1.0@-133.611,-47.781 CN2.6 CN2.7 CN2.8 CN6.1 CN7.36 CN13.6 CN13.8 CN14.1 CN15.36 CN19.1 CN20.36 CN22.21 CN22.22 CN22.26 CN22.27 D3.0 D4.0 FD3.0 FD4.0 MOD0.0 MOD1.0 MOD2.0 MOD3.6 MOD3.28 MOD3.29 MOD3.30 MOD3.31 MOD3.33 MOD3.34 MOD3.35 MOD3.36 MOD3.37 MOD3.39 MOD3.40 MOD3.41 MOD3.78 MOD3.94 S1.2@-135.849,-14.342 U12.5 U13.6 U13.7 U13.8 U13.33

## Polygon pours and split planes (outlines as drawn)
NetF1_1 on Top Layer "Top Layer-No Net 1" (solid, remove dead copper, pour order 18): -122.682,-43.307 -120.523,-43.307 -120.523,-45.974 -121.793,-45.974 -123.317,-47.498 -125.73,-47.498 -125.73,-46.355 -123.825,-46.355 -122.682,-45.212
VIN_USB on Top Layer "TOP FILL GND" (solid, pour order 17): -124.46,-43.307 -128.27,-43.307 -128.651,-43.688 -131.826,-43.688 -131.836,-44.761 -129.169,-44.761 -128.083,-45.847 -124.46,-45.847
VIN_5V on Top Layer "Top Layer-No Net 1" (solid, remove dead copper, pour order 19): -120.904,-48.133 -110.744,-48.133 -110.744,-43.434 -113.03,-43.434 -116.332,-46.736 -120.269,-46.736 -120.904,-47.371
NetCN1_5 on Top Layer "TOP FILL GND" (solid, pour order 16): -127,-48.26 -124.968,-48.26 -124.968,-49.657 -127.762,-49.657 -129.159,-48.26 -131.836,-48.291 -131.836,-46.92 -129.169,-46.92 -128.397,-46.101 -127,-46.101
5V on Top Layer "Top Layer-No Net 1" (solid, remove dead copper, pour order 20): -102.362,-43.307 -110.109,-43.307 -110.109,-44.577 -102.489,-44.577 -102.362,-44.45
GND on Top Layer "Mechanical 15-No Net" (solid, remove dead copper, pour order 21): 8.695,105.59 8.695,-61.804 -138.818,-61.804 -139.072,-62.058 -139.081,-31.413 -139.072,105.836
GND on Bottom Layer "Mechanical 15-No Net" (solid, remove dead copper, pour order 22): 8.695,105.59 8.695,-61.804 -138.818,-61.804 -139.072,-62.058 -139.081,-31.413 -139.072,105.836

## Keep-outs
Keep-Out Layer:
  rectangle: -72.56,-61.507 -59.56,-48.557

## Other copper
Top Layer:
  text "TOP COPPER LAYER" at 24.807,55.751 h1.52
Bottom Layer:
  text "BOTTOM COPPER LAYER" at 24.68,52.823 h1.52

## Silkscreen, mask and mechanical layers (free items; w line width, h text height)
Top Overlay:
  circle w0.5: c-24.191,-6.4 r6.725
  circle w0.5: c-24.191,76.225 r6.725
  circle w0.5: c-101.241,76.3 r6.725
  lines w0.178: -132.893,54.877 -132.893,56.02 ; -55.866,-23.71 -55.866,-22.567 ; -55.866,55.1 -55.866,56.243 ; -132.893,56.02 -131.75,56.02 -132.893,57.163 -134.036,56.02 -132.893,56.02 ; -55.866,-22.567 -54.723,-22.567 -55.866,-21.424 -57.009,-22.567 -55.866,-22.567 ; -55.866,56.243 -54.723,56.243 -55.866,57.386 -57.009,56.243 -55.866,56.243
  lines w0.2: -109.185,52.197 -109.185,61.595 -94.58,61.595 -94.58,52.197 -109.185,52.197 ; -32.135,-30.053 -32.135,-20.655 -17.53,-20.655 -17.53,-30.053 -32.135,-30.053 ; -32.131,52.197 -17.526,52.197 -17.526,61.595 -32.131,61.595 -32.131,52.197
  text "D13 -> D0" at -128.27,92.71 h5
  text "A3 -> A0, I2C" at -95.885,92.71 h5
  text "D13 -> D0" at -51.435,92.71 h5
  text "A3 -> A0, I2C" at -19.05,92.71 h5
  text "0" at -103.632,72.136 h15
  text "1" at -26.416,72.136 h15
  text "TOP SILK" at 24.807,60.751 h1.52
  text "3V3" at -100.295,59.309 h2.54
  text "3V3" at -23.241,59.309 h2.54
  text "5V" at -99.787,57.023 h2.54
  text "5V" at -22.733,57.023 h2.54
  text "VCC0 VOLTAGE" at -108.423,54.356 h2.54
  text "VCC1 VOLTAGE" at -31.369,54.356 h2.54
  text "ONLY FIT ONE JUMPER" at -107.823,52.959 h1.52
  text "ONLY FIT ONE JUMPER" at -30.734,52.959 h1.52
  text "CAUTION: DO NOT USE VIN1 IF L9 FITTED" at -46.609,49.53 h1.52
  text "CAUTION: DO NOT USE VIN0 IF L8 FITTED" at -123.825,49.276 h1.52
  text "+" at -55.066,49 h1.52 r90
  text "+" at -132.266,48.6 h1.52 r90
  text "VIN1" at -55.118,43.434 h3.05 r90
  text "VIN0" at -132.334,42.672 h3.05 r90
  text "SDA_2" at 1.64,28.9 h1.52
  text "SCL_2" at 1.634,21.491 h1.52
  text "GND" at -11.303,17.424 h1.52
  text "CLKOUT" at -99.4,16.6 h2.54 r45
  text "FPGA" at -125.857,10.795 h2.54
  text "D13 -> D9" at -51.435,10.795 h5
  text "A5 -> A0, I2C" at -19.05,10.795 h5
  text "JTAG" at -125.857,8.636 h2.54
  text "LAYER" at -113.03,0.762 h3.81 r90
  text "CLKIN" at -68.458,0.4 h2.54 r45
  text "FPGAMODULE.COM" at -110.617,-6.35 h2.79 r90
  text "THIN" at -113.03,-6.731 h4.57 r90
  text "2" at -26.416,-10.16 h15
  text "FPGA" at -125.349,-11.43 h2.54
  text "FOR HELIX_4" at -92.4,-13.5 h2.54 r45
  text "RECONFIGURE" at -125.476,-13.716 h2.54
  text "ACT" at -69.67,-13.716 h2.54
  text "MODULE REV C" at -90.3,-17.8 h2.54 r45
  text "1" at -137.287,-18.186 h1.52 r90
  text "3V3" at -23.245,-22.941 h2.54
  text "5V" at -22.737,-25.227 h2.54
  text "VCC2 VOLTAGE" at -31.373,-27.894 h2.54
  text "VIN2" at -57.963,-28.296 h3.05 r90
  text "ONLY FIT ONE JUMPER" at -30.734,-29.21 h1.52
  text "+" at -55.166,-29.8 h1.52 r90
  text "CAUTION: DO NOT USE VIN2 IF L10 FITTED" at -46.736,-32.512 h1.52
  text "POWER" at -102.997,-34.29 h2.54
  text "PSOC" at -137.541,-35.941 h2.54
  text "FPGA OK" at -117.983,-36.195 h2.54
  text "DEBUG" at -137.922,-37.846 h2.54
  text "BUT1" at -94.742,-52.07 h3.05
  text "BUT0" at -83.82,-52.07 h3.05
  text "GND" at -103.124,-53.929 h1.52
  text "MULTI-SHIELD REV E1" at -95.123,-57.277 h2.79
  text "POWER" at -115.951,-57.658 h2.54
Top Paste:
  text "TOP PASTE" at 24.634,32.171 h1.52
Top Solder:
  text "TOP SOLDER MASK" at 24.807,58.251 h1.52
  text "TOP SOLDER MASK" at 24.634,28.9 h1.52
Bottom Solder:
  text "BOTTOM SOLDER MASK" at 24.68,50.323 h1.52
Mechanical 1:
  the board outline again, w0.127
  text "BOARD OUTLINE" at 24.634,38.9 h1.52
Mechanical 2:
  text "HELIX_4_MULTI_SHIELD REV E1" at 22.942,102.23 h1.52
  text "B.SINGER - PASS DRC ON 19/09/2013" at 25.442,99.73 h1.52
  text "RELEASED 19/09/2013" at 25.442,97.23 h1.52
  text "BOARD NOTES:" at 22.942,92.23 h1.52
  text "MATERIAL:" at 25.442,89.73 h1.52
  text "2 LAYERS FR4" at 27.942,87.23 h1.52
  text "1.6MM FINISHED THICKNESS" at 27.909,84.347 h1.52
  text "PAD FINISH:" at 25.569,81.247 h1.52
  text "LEAD FREE (ROHS) HAL FINISH" at 28.069,78.747 h1.52
  text "PROVIDE LOOSE, NO TABS, NO V-SCORE" at 25.402,75.351 h1.52
  text "NO IMPEDANCE CONTROL" at 25.402,72.851 h1.52
  text "*WHITE* SILK ON TOP SIDE ONLY" at 25.402,70.351 h1.52
  text "TOP / BOT *BLACK* SOLDER MASK" at 25.402,67.851 h1.52
  text "Layer Stackup" at 22.307,63.251 h1.52
  text "NOTE: THERE IS NO BOTTOM SILK OR PASTE" at 24.68,47.823 h1.52
  text "Mechanical Layers" at 22.194,43.326 h1.52
  text "FAB NOTES" at 24.634,35.45 h1.52
Mechanical 14:
  text "Copyright (c) 2013, Thin Layer Embedded Pty Ltd" at 25.654,-20.32 h1.52
  text "All rights reserved." at 25.654,-22.098 h1.52
  text "Redistribution and use in source and binary forms, with or without" at 25.654,-25.654 h1.52
  text "modification, are permitted provided that the following conditions are met:" at 25.654,-27.432 h1.52
  text "1. Redistributions of source code must retain the above copyright notice," at 25.654,-30.988 h1.52
  text "this list of conditions and the following disclaimer." at 25.654,-32.766 h1.52
  text "2. Redistributions in binary form must reproduce the above copyright notice," at 25.654,-34.544 h1.52
  text "this list of conditions and the following disclaimer in the documentation" at 25.654,-36.322 h1.52
  text "and/or other materials provided with the distribution." at 25.654,-38.1 h1.52
  text "THIS SOFTWARE IS PROVIDED BY THE COPYRIGHT HOLDERS AND CONTRIBUTORS \"AS IS\"" at 25.654,-41.656 h1.52
  text "AND ANY EXPRESS OR IMPLIED WARRANTIES, INCLUDING, BUT NOT LIMITED TO, THE" at 25.654,-43.434 h1.52
  text "IMPLIED WARRANTIES OF MERCHANTABILITY AND FITNESS FOR A PARTICULAR PURPOSE" at 25.654,-45.212 h1.52
  text "ARE DISCLAIMED. IN NO EVENT SHALL THE COPYRIGHT OWNER OR CONTRIBUTORS BE" at 25.654,-46.99 h1.52
  text "LIABLE FOR ANY DIRECT, INDIRECT, INCIDENTAL, SPECIAL, EXEMPLARY, OR" at 25.654,-48.768 h1.52
  text "CONSEQUENTIAL DAMAGES (INCLUDING, BUT NOT LIMITED TO, PROCUREMENT OF" at 25.654,-50.546 h1.52
  text "SUBSTITUTE GOODS OR SERVICES; LOSS OF USE, DATA, OR PROFITS; OR BUSINESS" at 25.654,-52.324 h1.52
  text "INTERRUPTION) HOWEVER CAUSED AND ON ANY THEORY OF LIABILITY, WHETHER IN" at 25.654,-54.102 h1.52
  text "CONTRACT, STRICT LIABILITY, OR TORT (INCLUDING NEGLIGENCE OR OTHERWISE)" at 25.654,-55.88 h1.52
  text "ARISING IN ANY WAY OUT OF THE USE OF THIS SOFTWARE, EVEN IF ADVISED OF THE" at 25.654,-57.658 h1.52
  text "POSSIBILITY OF SUCH DAMAGE." at 25.654,-59.436 h1.52
Mechanical 15:
  lines w0.178: -125.2,46.44 -123.62,46.44 ; -125.2,69.3 -123.62,69.3 ; -123.62,45.34 -123.62,46.44 ; -123.62,47.54 -123.62,46.44 ; -123.62,68.2 -123.62,69.3 ; -123.62,70.4 -123.62,69.3 ; -122.04,46.44 -123.62,46.44 ; -122.04,69.3 -123.62,69.3 ; -80.22,33.74 -78.64,33.74 ; -78.64,32.64 -78.64,33.74 ; -78.64,34.84 -78.64,33.74 ; -77.06,33.74 -78.64,33.74 ; -48.2,-35.56 -46.62,-35.56 ; -48.2,-12.7 -46.62,-12.7 ; -48.2,46.44 -46.62,46.44 ; -48.2,69.3 -46.62,69.3 ; -46.62,-36.66 -46.62,-35.56 ; -46.62,-34.46 -46.62,-35.56 ; -46.62,-13.8 -46.62,-12.7 ; -46.62,-11.6 -46.62,-12.7 ; -46.62,45.34 -46.62,46.44 ; -46.62,47.54 -46.62,46.44 ; -46.62,68.2 -46.62,69.3 ; -46.62,70.4 -46.62,69.3 ; -45.04,-35.56 -46.62,-35.56 ; -45.04,-12.7 -46.62,-12.7 ; -45.04,46.44 -46.62,46.44 ; -45.04,69.3 -46.62,69.3 ; -3.22,-48.26 -1.64,-48.26 ; -3.22,33.74 -1.64,33.74 ; -1.64,-49.36 -1.64,-48.26 ; -1.64,-47.16 -1.64,-48.26 ; -1.64,32.64 -1.64,33.74 ; -1.64,34.84 -1.64,33.74 ; -0.06,-48.26 -1.64,-48.26 ; -0.06,33.74 -1.64,33.74
  text "IGNORE THIS LAYER" at 24.299,26.198 h1.52

## Dimensions
-140.13,106.9 to 9.87,106.9 on Mechanical 1
-140.13,106.9 to -140.13,-63.1 on Mechanical 1

## Text inside footprints (layer, text, board x,y; h text height)
CN2: Top Overlay "9" at -129.907,10.713 h1 r90; Top Overlay "1" at -129.907,-2.687 h1 r90
CN6: Top Overlay "NO CONNECT" at -120.815,68.665 h2.03; Top Overlay "VIN0" at -120.815,50.885 h2.03; Top Overlay "GND" at -120.815,53.425 h2.03; Top Overlay "GND" at -120.815,55.965 h2.03; Top Overlay "VCC0" at -120.815,58.505 h2.03; Top Overlay "3V3" at -120.815,61.045 h2.03; Top Overlay "RESET" at -120.815,63.585 h2.03; Top Overlay "IOREF" at -120.815,66.125 h2.03
CN7: Top Overlay "SDA" at -87.795,75.253 h2.03; Top Overlay "SCL" at -87.795,77.793 h2.03; Top Overlay "AREF" at -87.795,72.713 h2.03; Top Overlay "GND" at -87.795,70.173 h2.03; Top Overlay "D13" at -87.795,67.633 h2.03; Top Overlay "D12" at -87.795,65.093 h2.03; Top Overlay "D11" at -87.795,62.553 h2.03; Top Overlay "D10" at -87.795,60.013 h2.03; Top Overlay "D9" at -87.795,57.473 h2.03; Top Overlay "D8" at -87.795,54.933 h2.03
CN8: Top Overlay "A0" at -120.815,45.805 h2.03; Top Overlay "A1" at -120.815,43.265 h2.03; Top Overlay "A2" at -120.815,40.725 h2.03; Top Overlay "A3" at -120.815,38.185 h2.03; Top Overlay "SDA" at -120.815,35.645 h2.03; Top Overlay "SCL" at -120.815,33.105 h2.03
CN12: Top Overlay "D7" at -87.795,50.885 h2.03; Top Overlay "D6" at -87.795,48.345 h2.03; Top Overlay "D5" at -87.795,45.805 h2.03; Top Overlay "D4" at -87.795,43.265 h2.03; Top Overlay "D3" at -87.795,40.725 h2.03; Top Overlay "D2" at -87.795,38.185 h2.03; Top Overlay "D1/TX" at -87.795,35.645 h2.03; Top Overlay "D0/RX" at -87.795,33.105 h2.03
CN14: Top Overlay "NO CONNECT" at -43.815,68.665 h2.03; Top Overlay "VIN1" at -43.815,50.885 h2.03; Top Overlay "GND" at -43.815,53.425 h2.03; Top Overlay "GND" at -43.815,55.965 h2.03; Top Overlay "VCC1" at -43.815,58.505 h2.03; Top Overlay "3V3" at -43.815,61.045 h2.03; Top Overlay "RESET" at -43.815,63.585 h2.03; Top Overlay "IOREF" at -43.815,66.125 h2.03
CN15: Top Overlay "SDA" at -10.795,75.253 h2.03; Top Overlay "SCL" at -10.795,77.793 h2.03; Top Overlay "AREF" at -10.795,72.713 h2.03; Top Overlay "GND" at -10.795,70.173 h2.03; Top Overlay "D13" at -10.795,67.633 h2.03; Top Overlay "D12" at -10.795,65.093 h2.03; Top Overlay "D11" at -10.795,62.553 h2.03; Top Overlay "D10" at -10.795,60.013 h2.03; Top Overlay "D9" at -10.795,57.473 h2.03; Top Overlay "D8" at -10.795,54.933 h2.03
CN16: Top Overlay "A0" at -43.815,45.805 h2.03; Top Overlay "A1" at -43.815,43.265 h2.03; Top Overlay "A2" at -43.815,40.725 h2.03; Top Overlay "A3" at -43.815,38.185 h2.03; Top Overlay "SDA" at -43.815,35.645 h2.03; Top Overlay "SCL" at -43.815,33.105 h2.03
CN17: Top Overlay "D7" at -10.795,50.885 h2.03; Top Overlay "D6" at -10.795,48.345 h2.03; Top Overlay "D5" at -10.795,45.805 h2.03; Top Overlay "D4" at -10.795,43.265 h2.03; Top Overlay "D3" at -10.795,40.725 h2.03; Top Overlay "D2" at -10.795,38.185 h2.03; Top Overlay "D1/TX" at -10.795,35.645 h2.03; Top Overlay "D0/RX" at -10.795,33.105 h2.03
CN19: Top Overlay "NO CONNECT" at -43.815,-13.335 h2.03; Top Overlay "VIN2" at -43.815,-31.115 h2.03; Top Overlay "GND" at -43.815,-28.575 h2.03; Top Overlay "GND" at -43.815,-26.035 h2.03; Top Overlay "VCC2" at -43.815,-23.495 h2.03; Top Overlay "3V3" at -43.815,-20.955 h2.03; Top Overlay "RESET" at -43.815,-18.415 h2.03; Top Overlay "IOREF" at -43.815,-15.875 h2.03
CN20: Top Overlay "A4/SDA" at -10.795,-6.747 h2.03; Top Overlay "A5/SCL" at -10.795,-4.207 h2.03; Top Overlay "AREF" at -10.795,-9.287 h2.03; Top Overlay "GND" at -10.795,-11.827 h2.03; Top Overlay "D13" at -10.795,-14.367 h2.03; Top Overlay "D12" at -10.795,-16.907 h2.03; Top Overlay "D11" at -10.795,-19.447 h2.03; Top Overlay "D10" at -10.795,-21.987 h2.03; Top Overlay "D9" at -10.795,-24.527 h2.03
CN21: Top Overlay "A0" at -43.815,-36.195 h2.03; Top Overlay "A1" at -43.815,-38.735 h2.03; Top Overlay "A2" at -43.815,-41.275 h2.03; Top Overlay "A3" at -43.815,-43.815 h2.03; Top Overlay "A4/SDA" at -43.815,-46.355 h2.03; Top Overlay "A5/SCL" at -43.815,-48.895 h2.03
MOD0: Top Overlay "1" at -125.895,72.094 h5.08
MOD1: Top Overlay "1" at -48.895,72.094 h5.08
MOD2: Top Overlay "1" at -48.895,-9.906 h5.08